# Altium PCB AYBR3000-V2.0.PcbDoc
Units mm, origin at the board's own origin, x right, y up, seen from the top; angles counter-clockwise.
Board outline 49 x 118.5 mm, 2 copper layers (TopLayer, BottomLayer); 74 components, 81 nets, 446 pads, 105 vias.
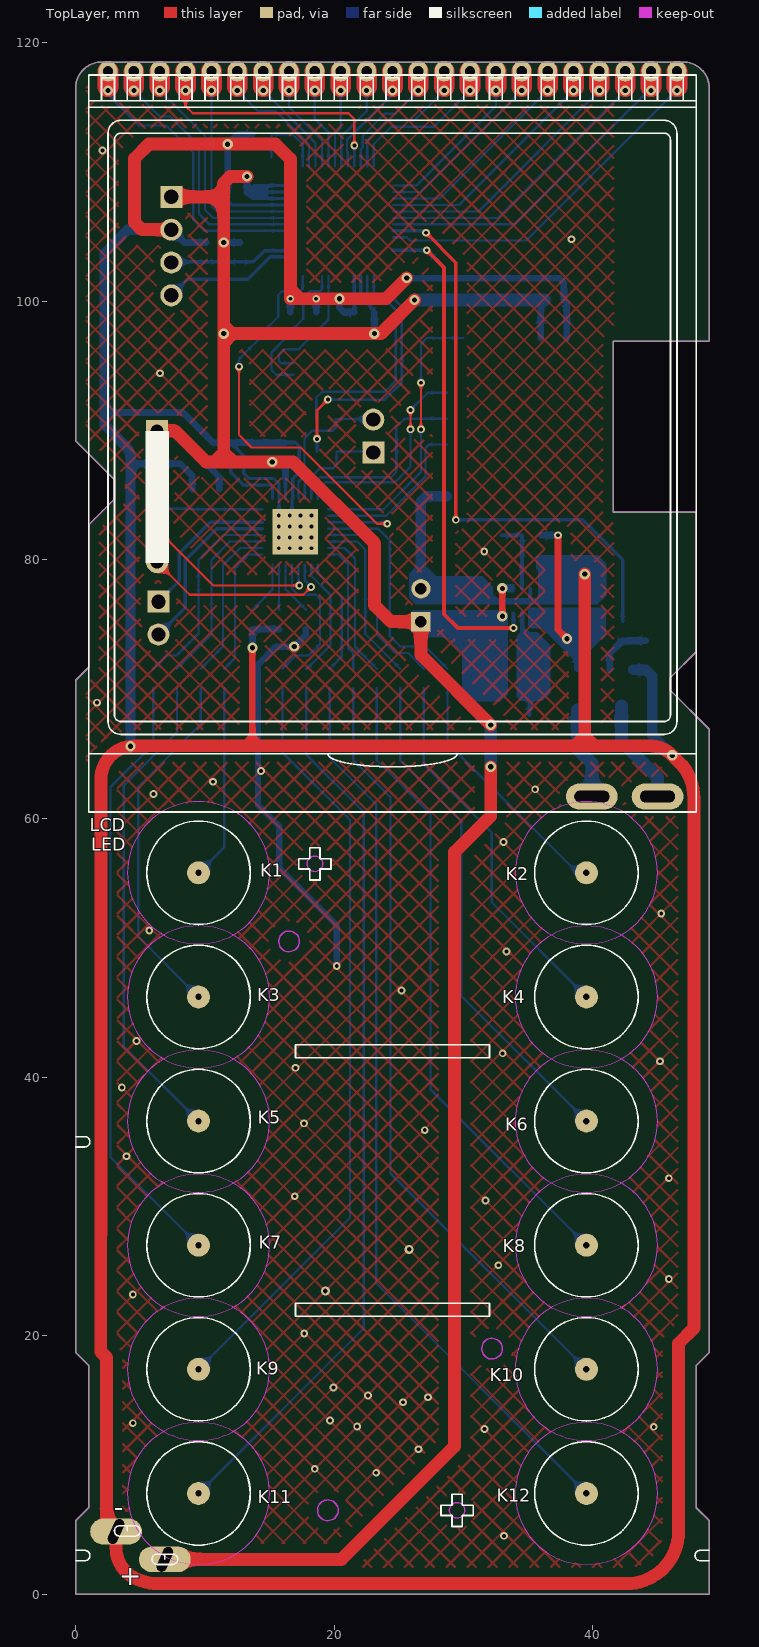
[diagram p0: TopLayer view]
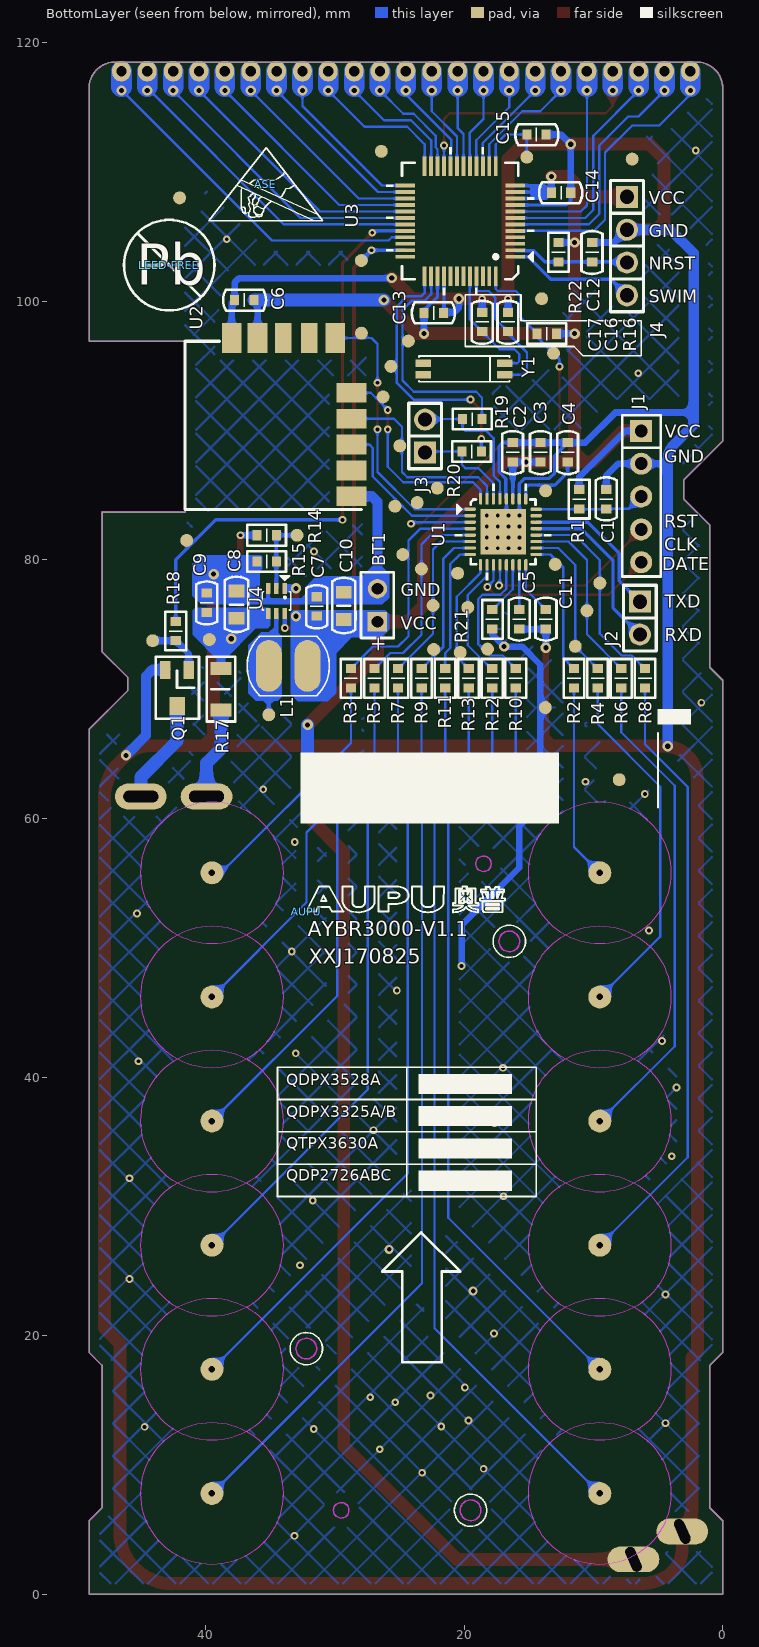
[diagram p1: BottomLayer view, seen from below]

## Layer stack, top to bottom
TopSolder: solder mask 0.0102, Solder Resist, Dk 3.5
TopLayer: signal copper 0.0356
Dielectric1: dielectric 0.32, FR-4, Dk 4.8
BottomLayer: signal copper 0.0356
BottomSolder: solder mask 0.0102, Solder Resist, Dk 3.5

## Board outline
0,0 0,5.7 1,6.7 1,17.7 0,18.7 0,70.7 1,71.7 1,82.7 3,84.7 3,86.2 0,89.2 0,116.5 cw(c2,116.5) 2,118.5 47,118.5 cw(c47,116.5) 49,116.5 48.997,116.497 48.997,96.901 41.58,96.901 41.58,83.7 48,83.7 48,72.9 46,70.9 46,69.9 49,66.9 49,18.7 48,17.7 48,6.7 49,5.7 49,0

## Design rules (kind name [scope] priority, off if disabled: settings)
Clearance Clearance_2 [All vs InPolygon] p1 off: gap=0.5 ignorepadtopadclearanceinfootprint=FALSE except(0.7: Arc-Fill Arc-Poly Arc-Region Track-Fill Track-Poly Track-Region)
Clearance Clearance_1 [All vs OnLayer('KeepOutLayer')] p2 off: gap=0.5 ignorepadtopadclearanceinfootprint=FALSE
Clearance [All] p3: gap=0.178 ignorepadtopadclearanceinfootprint=FALSE except(0.25: Arc-Fill Arc-Poly Arc-Region Track-Fill Track-Poly Track-Region SMDPad-Fill SMDPad-Poly SMDPad-Region THPad-Fill THPad-Poly THPad-Region Via-Fill Via-Poly Via-Region Fill-Fill Fill-Poly Fill-Region Poly-Poly Poly-Region Region-Region)
FabricationTestPointUsage TestPointUsage [All] p1: valid=0 allowmultiple=FALSE
FabricationTestpoint Testpoint [All] p1: side=3 testpointundercomponent=TRUE minsize=1.016 maxsize=2.54 preferedsize=1.524 minholesize=0.508 maxholesize=1.016 preferedholesize=0.813 testpointgrid=0.025 allowsidetop=TRUE allowsidebottom=TRUE usegrid=TRUE gridtolerance=0
HoleToHoleClearance [All] p1: gap=0 allowstackedmicrovias=TRUE
MinimumSolderMaskSliver [All] p1: minsoldermaskwidth=0
PolygonConnect PolygonConnect_1 [All] p1: thpad.connectstyle=Relief thpad.reliefconductorwidth=0.178 thpad.reliefentries=4 thpad.polygonreliefangle="90 Angle" thpad.airgapwidth=0.508 smdpad.connectstyle=Relief smdpad.reliefconductorwidth=0.178 smdpad.reliefentries=4 smdpad.polygonreliefangle="90 Angle" smdpad.airgapwidth=0.254 via.connectstyle=Direct via.reliefconductorwidth=0.254 via.reliefentries=4 via.polygonreliefangle="90 Angle" via.airgapwidth=0.254
PolygonConnect [All] p2: connectstyle=Direct reliefconductorwidth=0.254 reliefentries=4 polygonreliefangle="90 Angle" airgapwidth=0.254
RoutingPriority [All] p1: routingpriority=4
RoutingVias [All] p1: holewidth=0.508 width=1.27 viastyle="Through Hole" minholewidth=0.711 minwidth=1.27 maxholewidth=0.711 maxwidth=1.27
SilkToSilkClearance [All] p1: silktosilkclearance=0
SilkToSolderMaskClearance [IsPad] p1: minsilkscreentomaskgap=0 clearancetoexposedcopper=TRUE
SolderMaskExpansion [All] p1: expansion=0.102
Width [All] p1: maxlimit=3 minlimit=0.15 preferedwidth=0.178
23 further rules are at their usual default settings.

## Classes and differential pairs
component class AYBR3000-V2.0: ASE AUPU BT1 C1 C2 C3 C4 C5 C6 C7 C8 C9 C10 C11 C12 C13 C14 C15 C16 C17 J1 J2 J3 J4 K1 K2 K3 K4 K5 K6 K7 K8 K9 K10 K11 K12 L1 LCD LED LEED-FREE Q1 R1 R2 R3 R4 R5 R6 R7 R8 R9 R10 R11 R12 R13 R14 R15 R16 R17 R18 R19 R20 R21 R22 U1 U2 U3 U4 Y1

## Components (designator, comment, footprint, x,y, rotation, side; value= is the part's Value field where it differs from the comment)
ASE "ASE" _ASE 35.259,108.416 r180 bottom
AUPU "AUPU" aupu_logo 32.2,52.8 r180 bottom
BT1 "" BAT-2 26.7,76.5 r90 bottom
C1 "104P" C0603-T 9,84.7 r90 bottom
C2 "105P" C0603-T 16.247,88.321 r270 bottom
C3 "104P" C0603-T 14.088,88.321 r270 bottom
C4 "104P" C0603-T 11.992,88.321 r270 bottom
C5 "4.7nF" C0603-T 15.737,75.4 r90 bottom
C6 "100nF" C0603-T 37,100.1 r180 bottom
C7 "104P" C0603-T 31.4,76.4 r270 bottom
C8 "106P" C0805-T 37.6,76.54 r270 bottom
C9 "104P" C0603-T 39.9,76.7 r270 bottom
C10 "106P" C0805-T 29.3,76.45 r270 bottom
C11 "10nF" C0603-T 13.67,75.4 r90 bottom
C12 "104P" C0603-T 10.1,103.8 r270 bottom
C13 "104P" C0603-T 22.354,99.098 r0 bottom
C14 "104P" C0603-T 12.5,108.4 r0 bottom
C15 "105P" C0603-T 14.4,112.9 r180 bottom
C16 "15P" C0603-T 16.6,98.4 r270 bottom
C17 "15P" C0603-T 18.6,98.4 r270 bottom
J1 "CON5" PZ-1*5-M-DO 6.3,89.98 r270 bottom
J2 "" CZ-2.54-2P 6.4,75.5 r270 bottom
J3 "" CZ-2.54-2P 23.015,89.581 r90 bottom
J4 "nc 2.54mm/4针" CZ-2.54-4P 7.4,104.27 r270 bottom
K1 "" GYTH-YKLH-02A 9.5,55.8 r0 top
K2 "" GYTH-YKLH-02A 39.5,55.8 r0 top locked
K3 "" GYTH-YKLH-02A 9.5,46.2 r0 top
K4 "" GYTH-YKLH-02A 39.5,46.2 r0 top
K5 "" GYTH-YKLH-02A 9.5,36.6 r0 top
K6 "" GYTH-YKLH-02A 39.5,36.6 r0 top
K7 "" GYTH-YKLH-02A 9.5,27 r0 top
K8 "" GYTH-YKLH-02A 39.5,27 r0 top
K9 "" GYTH-YKLH-02A 9.5,17.4 r0 top
K10 "" GYTH-YKLH-02A 39.5,17.4 r0 top
K11 "" GYTH-YKLH-02A 9.5,7.8 r0 top
K12 "" GYTH-YKLH-02A 39.5,7.8 r0 top
L1 "10uH" CD32-T 33.6,71.8 r0 bottom
LCD "YKLH-02A液晶屏 A" LCD-YKLH-02A 2.5,117.8 r0 top locked
LED "背光" BLK-YKLH-02A-2 1,60.5 r0 top locked
LEED-FREE "LEED-FREE" _LEED-FREE 42.8,102.8 r180 bottom
Q1 "8050" SOT23-123-T 42.2,70.1 r0 bottom
R1 "47K,1%" R0603-T 11.1,84.7 r90 bottom
R2 "510R" R0603-T 11.5,70.837 r90 bottom
R3 "510R" R0603-T 28.751,70.837 r90 bottom
R4 "510R" R0603-T 9.67,70.837 r90 bottom
R5 "510R" R0603-T 26.929,70.837 r90 bottom
R6 "510R" R0603-T 7.84,70.837 r90 bottom
R7 "510R" R0603-T 25.108,70.837 r90 bottom
R8 "510R" R0603-T 6.011,70.837 r90 bottom
R9 "510R" R0603-T 23.286,70.837 r90 bottom
R10 "510R" R0603-T 16,70.837 r90 bottom
R11 "510R" R0603-T 21.465,70.837 r90 bottom
R12 "510R" R0603-T 17.822,70.837 r90 bottom
R13 "510R" R0603-T 19.643,70.837 r90 bottom
R14 "1M" R0603-T 35.274,81.906 r180 bottom
R15 "430K" R0603-T 35.274,79.874 r180 bottom
R16 "100K,5%" R0603-T 13.6,97.5 r0 bottom
R17 "10R" R1206-T 38.8,70 r90 bottom
R18 "20K" R0603-T 42.3,74.5 r90 bottom
R19 "0k" R0603-T 19.362,90.892 r180 bottom
R20 "0k" R0603-T 19.415,88.381 r180 bottom
R21 "1K,1%" R0603-T 17.808,75.4 r270 bottom
R22 "22K" R0603-T 12.7,103.8 r90 bottom
U1 "MCU_CY8C4024LQI-S412_QFN32" QFN32-5*5-T 16.977,82.17 r180 bottom
U2 "A7105" MD7105-A04 41.58,96.901 r180 bottom locked
U3 "MCU-STM8L052C6-48PIN" LQFP48-7*7-T 20.3,106.2 r0 bottom
U4 "SY7071" SOT363 34.512,76.826 r270 bottom locked
Y1 "32.768K" MC-146 19.99,94.767 r0 bottom
? "Comment" _MARK 14,100.2 r270 bottom
? "Comment" _MARK 26.4,111.6 r270 bottom
? "Comment" _MARK 42,108 r270 bottom
? "Comment" _MARK 7,111 r270 bottom
? "Comment" _MARK 8,63 r270 bottom
? "Comment" _ARROW 23.266,17.932 r90 bottom

## Footprints (in the part's own frame and the unit in brackets; to place one, negate y for a bottom-side part, rotate by r counter-clockwise, add the part's x,y. Pads: shape width x height; smd on the part's side, far side on the other; paste and mask are expansions set on the pad)
_ARROW [mm]
  silkscreen extent 0,-2.97 10.06,3.07
_ASE [mil]
  round 3.94 on Bottom Overlay: 157(-16.88,-72.78) 158(-13.58,-68.16) 159(-14.27,-62.82) 160(-13.58,-68.16) 161(-25.44,-73.84) 162(-21.39,-73.66) 163(-21.39,-73.66) 164(-16.88,-72.78) 165(-28.05,-72.49) 166(-25.57,-73.77) 167(-29.3,-68.34) 168(-28.05,-72.49) 169(-17.55,-68.35) 170(-9.75,-54.94) 171(81.45,21.12) 172(87.24,21.45) 173(70.33,12.35) 174(81.45,21.12) 175(57.45,11.18) 176(70.33,12.35) 177(55.11,3.58) 178(57.45,11.18) 179(49.85,-3.43) 180(55.11,3.58) 181(46.33,-11.62) 182(49.85,-3.43) 183(38.14,-14.55) 184(46.33,-11.62) 185(-79.37,38.24) 186(156.26,-67.83) 187(-91.88,22.29) 188(144.07,-85.89) 189(-11.6,-50.22) 190(-8.68,-50.22) 191(-17.46,-48.47) 192(-11.6,-50.22) 193(-27.41,-41.45) 194(-17.46,-48.47) 195(-30.33,-41.45) 196(-27.41,-41.45) 197(-38.53,-47.3) 198(-30.33,-41.45) 199(-64.87,-64.84) 200(-64.87,-58.99) 201(-65.45,-49.64) 202(-64.87,-58.99) 203(-68.38,-45.54) 204(-65.45,-49.64) 205(-73.64,-45.54) 206(-68.38,-45.54) 207(-77.74,-43.2) 208(-73.64,-45.54) 209(-25.07,-18.64) 210(-15.71,-12.63) 211(-25.07,-18.64) 212(-24.48,-24.49) 213(-26.82,-31.51) 214(-24.48,-24.49) 215(-30.92,-36.18) 216(-26.82,-31.51) 217(-38.53,-39.11) 218(-30.92,-36.18) 219(4.2,-34.43) 220(13.33,-25.95) 221(0.69,-38.52) 222(4.2,-34.43) 223(-8.68,-49.05) 224(0.69,-38.52) 225(-9.85,-54.9) 226(-8.68,-49.05) 227(-29.16,-68.35) 228(-17.46,-68.35) 229(-35.02,-63.09) 230(-29.16,-68.35) 231(-34.43,-13.38) 232(-34.43,-4.05) 233(-37.94,-18.06) 234(-34.43,-13.38) 235(-42.04,-21.57) 236(-37.94,-18.06) 237(-43.21,-26.24) 238(-42.04,-21.57) 239(-43.8,-35.01) 240(-43.21,-26.24) 241(-43.8,-35.01) 242(-39.11,-39.11) 243(-39.11,-47.3) 244(-39.11,-39.11) 245(-40.28,-58.99) 246(-39.11,-47.3) 247(-40.28,-58.99) 248(-36.77,-61.92) 249(-36.77,-61.92) 250(-33.26,-64.84) 251(-33.26,-64.84) 252(-31.51,-74.2) 253(-36.77,-75.95) 254(-31.51,-74.2) 255(-48.48,-75.95) 256(-36.77,-75.95) 257(-54.33,-70.69) 258(-48.48,-75.95) 259(-54.33,-70.69) 260(-54.33,-59.58) 261(-47.89,-6.36) 262(-39.04,-1.94) 263(-50.82,-11.04) 264(-47.89,-6.36) 265(-56.08,-13.96) 266(-50.82,-11.04) 267(-56.08,-13.96) 268(-55.5,-21.57) 269(-55.5,-21.57) 270(-53.74,-23.32) 271(-53.74,-23.32) 272(-52.57,-30.92) 273(-54.92,-34.43) 274(-52.57,-30.92) 275(-55.5,-37.94) 276(-54.92,-34.43) 277(-55.5,-37.94) 278(-53.74,-42.03) 279(-53.74,-42.03) 280(-50.82,-47.88) 281(-52.57,-58.41) 282(-50.82,-47.88) 283(-66.03,-65.43) 284(-52.57,-58.41) 285(-73.06,-59.58) 286(-66.03,-65.43) 287(-75.4,-52.56) 288(-73.06,-59.58) 289(-78.33,-47.88) 290(-75.4,-52.56) 291(-78.33,-47.88) 292(-78.33,8.26) 293(-78.33,8.26) 294(-73.96,14.07) 295(-53.78,26.72) 296(-39.11,36.91) 297(-39.11,36.91) 298(-27.41,40.42) 299(-27.41,40.42) 300(26.44,39.25) 301(26.44,39.25) 302(34.63,43.93) 303(34.63,43.93) 304(51.02,55.05) 305(51.02,55.05) 306(53.53,65.07) 307(-2,136.9) 308(170.69,-86.5) 309(-177.19,-86.5) 310(170.69,-86.5) 311(-177.19,-86.5) 312(-2,136.9)
  silkscreen extent -177,-86 171,137
_LEED-FREE [mm]
  silkscreen extent -3.5,-3.5 3.5,3.5
_MARK [mm]
  round 1 smd: 1(0,0)
aupu_logo [mm]
  silkscreen extent 0,-0.06 15.38,1.94
BAT-2 [mm] "Battery; 2 Leads"
  rect 1.5x1.5 hole 0.9: 1(-1.27,0)
  round 1.5 hole 0.9: 2(1.27,0)
  silkscreen extent -2.54,-1.27 2.54,1.27
BLK-YKLH-02A-2 [mm]
  oval 4x2 hole 0.9 slot 2.7 at 0 deg: 1(38.92,1.2) 2(44,1.2)
  silkscreen extent 0,0 47,54.5
C0603-T [mm]
  rect 0.7x0.8 smd: 1(-0.75,0) 2(0.75,0)
  silkscreen extent -1.64,-0.82 1.69,0.81
C0805-T [mm]
  rect 1x1.2 smd: 1(-1.05,0) 2(1.05,0)
  silkscreen extent -2.16,-0.9 2.11,0.9
CD32-T [mm]
  oval 2x4 smd: 1(-1.5,0) 2(1.5,0)
  silkscreen extent -3.18,-2.3 3.18,2.3
CZ-2.54-2P [mm] "插针"
  rect 1.7x1.7 hole 1.1: 1(-1.27,0)
  round 1.7 hole 1.1: 2(1.27,0)
  silkscreen extent -2.54,-1.27 2.54,1.27
CZ-2.54-4P [mm] "插针"
  rect 1.7x1.7 hole 1.1: 1(-3.81,0)
  round 1.7 hole 1.1: 2(-1.27,0) 3(1.27,0) 4(3.81,0)
  silkscreen extent -5.08,-1.27 5.08,1.27
GYTH-YKLH-02A [mil]
  round 70 hole 19.68: 1(0,0)
  silkscreen extent -157,-157 157,157
LCD-YKLH-02A [mm]
  oval 1.45x1.6 hole 0.8: 1(0,0) 2(2,0) 3(4,0) 4(6,0) 5(8,0) 6(10,0) 7(12,0) 8(14,0) 9(16,0) 10(18,0) 11(20,0) 12(22,0) 13(24,0) 14(26,0) 15(28,0) 16(30,0) 17(32,0) 18(34,0) 19(36,0) 20(38,0) 21(40,0) 22(42,0) 23(44,0)
  silkscreen extent -1.5,-53.8 45.5,-0.3
LQFP48-7*7-T [mm]
  rect 1.5x0.3 smd: 1(-4.25,2.75) 2(-4.25,2.25) 3(-4.25,1.75) 4(-4.25,1.25) 5(-4.25,0.75) 6(-4.25,0.25) 7(-4.25,-0.25) 8(-4.25,-0.75) 9(-4.25,-1.25) 10(-4.25,-1.75) 11(-4.25,-2.25) 12(-4.25,-2.75) 25(4.25,-2.75) 26(4.25,-2.25) 27(4.25,-1.75) 28(4.25,-1.25) 29(4.25,-0.75) 30(4.25,-0.25) 31(4.25,0.25) 32(4.25,0.75) 33(4.25,1.25) 34(4.25,1.75) 35(4.25,2.25) 36(4.25,2.75)
  rect 0.3x1.5 smd: 13(-2.75,-4.25) 14(-2.25,-4.25) 15(-1.75,-4.25) 16(-1.25,-4.25) 17(-0.75,-4.25) 18(-0.25,-4.25) 19(0.25,-4.25) 20(0.75,-4.25) 21(1.25,-4.25) 22(1.75,-4.25) 23(2.25,-4.25) 24(2.75,-4.25) 37(2.75,4.25) 38(2.25,4.25) 39(1.75,4.25) 40(1.25,4.25) 41(0.75,4.25) 42(0.25,4.25) 43(-0.25,4.25) 44(-0.75,4.25) 45(-1.25,4.25) 46(-1.75,4.25) 47(-2.25,4.25) 48(-2.75,4.25)
  silkscreen extent -5.75,-5.75 5.75,5.75
MC-146 [mm]
  rect 1.2x0.6 smd: 1(-3.15,-0.45) 2(3.15,-0.45) 3(3.15,0.45) 4(-3.15,0.45)
  silkscreen extent -3.5,-1 3.5,1
MD7105-A04 [mil]
  rect 60x90.55 smd: 1(142.04,10.19) 2(220.78,10.19) 5(457,10.19)
  rect 50x90.55 smd: 3(299.52,10.19) 4(378.26,10.19)
  rect 90.55x60 smd: 7(507,-156.66) 8(507,-235.4) 9(507,-314.14) 10(507,-392.88) 11(507,-471.62)
  silkscreen extent 0,-512 537,0
PZ-1*5-M-DO [mm]
  rect 1.7x1.7 hole 1: 1(0,0)
  round 1.7 hole 1: 2(2.54,0) 3(5.08,0) 4(7.62,0) 5(10.16,0)
  silkscreen extent -1.2,-1.47 11.26,1.5
QFN32-5*5-T [mm]
  round 0.6 hole 0.3: 0(-1.27,-1.27) 0(-1.27,-0.423) 0(-1.27,0.423) 0(-1.27,1.27) 0(-0.423,-1.27) 0(-0.423,-0.423) 0(-0.423,0.423) 0(-0.423,1.27) 0(0.423,1.27) 0(0.423,-1.27) 0(0.423,-0.423) 0(0.423,0.423) 0(1.27,1.27) 0(1.27,-1.27) 0(1.27,-0.423) 0(1.27,0.423)
  rect 3.5x3.5 smd far side: 0(0,0)
  rect 3.5x3.5 smd paste-1.75 mask+0.051: 0(0,0)
  oval 0.9x0.26 smd mask+0.051: 1(-2.55,1.75) 2(-2.55,1.25) 3(-2.55,0.75) 4(-2.55,0.25) 5(-2.55,-0.25) 6(-2.55,-0.75) 7(-2.55,-1.25) 8(-2.55,-1.75) 17(2.55,-1.75) 18(2.55,-1.25) 19(2.55,-0.75) 20(2.55,-0.25) 21(2.55,0.25) 22(2.55,0.75) 23(2.55,1.25) 24(2.55,1.75)
  oval 0.26x0.9 smd mask+0.051: 9(-1.75,-2.55) 10(-1.25,-2.55) 11(-0.75,-2.55) 12(-0.25,-2.55) 13(0.25,-2.55) 14(0.75,-2.55) 15(1.25,-2.55) 16(1.75,-2.55) 25(1.75,2.55) 26(1.25,2.55) 27(0.75,2.55) 28(0.25,2.55) 29(-0.25,2.55) 30(-0.75,2.55) 31(-1.25,2.55) 32(-1.75,2.55)
  silkscreen extent -3.75,-3.75 3.75,3.75
R0603-T [mm]
  rect 0.7x0.8 smd: 1(-0.75,0) 2(0.75,0)
  silkscreen extent -1.5,-0.8 1.5,0.8
R1206-T [mm]
  rect 1x1.6 smd: 1(-1.6,0) 2(1.6,0)
  silkscreen extent -2.5,-1.1 2.5,1.1
SOT23-123-T [mm]
  rect 0.8x1.4 smd: 1(-0.9,-1.4) 2(0.9,-1.4)
  rect 1.2x1.4 smd: 3(0,1.4)
  silkscreen extent -1.7,-2.4 1.65,2.4
SOT363 [mm]
  rect 0.85x0.35 smd: 1(-0.975,0.65) 2(-0.975,0) 3(-0.975,-0.65) 4(0.975,-0.65) 5(0.975,0) 6(0.975,0.65)
  silkscreen extent -1.96,-1.1 0.7,1.1

## Part data
BT1: library part Battery, "Multicell Battery", LatestRevisionDate=17-Jul-2002, LatestRevisionNote="Re-released for DXP Platform.", PackageDescription="Battery; 2 Leads", PackageReference=BAT-2, Published=24-Mar-1999, Publisher="Altium Limited"
C1 C2 C3 C4 C5 C7 C8 C9 C10 C11 C12 C13 C14 C15 C16 C17: library part CAP, "Capacitor"
C6: library part CAP
J1: "Connector"
J2 J3: library part CMA-6542PF, "Header, 2-Pin"
J4: library part CON4, "Connector"
K1 K2 K3 K4 K5 K6 K7 K8 K9 K10 K11 K12: library part KEY_TCH
L1: library part L
LCD: library part YKLH-02A液晶屏
LED: library part LED
Q1: library part NPN, "NPN Transistor"
R1 R2 R3 R4 R5 R6 R7 R8 R9 R10 R11 R12 R13 R14 R15 R16 R17 R18 R19 R20 R21 R22: library part RES2
U2: library part CON11, "Connector"
U3: library part MCU-STM8L052C6
Y1: library part CRYSTAL, "Crystal"

## Free pads (board coordinates)
  round 1 smd far side: 1(15.15,111.15) 6(13.081,95.981) 7(24.308,96.926) 8(25.654,94.971) 9(27.94,97.536) 10(26.264,92.608) 11(24.968,88.824) 12(22.073,85.547) 13(23.622,84.43) 14(25.349,84.15) 15(24.74,80.416) 16(23.3,79.299) 17(22.4,76.479) 18(22.352,73.076) 19(20.498,78.969) 20(20.3,72.847) 21(19.71,76.327) 22(18.186,73.101) 23(13.716,68.58) 24(44.083,73.75) 25(41.453,81.509) 26(39.7,73.838) 27(35.1,68.021) 28(32.918,81.906) 29(12.954,79.654) 30(11.4,73.316) 31(10.5,76.073) 32(9.5,78.207) 33(13.691,85.344) 34(27.945,103.155)
  oval 4x2 hole 0.762 slot 2 at 66.24 deg: 5(3.124,4.856) 5(6.897,2.708)

## Via types
v1: diameter 0.6, hole 0.3, TopLayer to BottomLayer, tented both sides, 61 vias
v2: diameter 0.8, hole 0.4, TopLayer to BottomLayer, tented both sides, 42 vias
v3: diameter 0.7, hole 0.35, TopLayer to BottomLayer, tented both sides, 2 vias

## Nets (pads, with @x,y where several pads share a name; then routed paths per layer and width w, separated by ;. In a path a pad name is that pad's centre, name@x,y a point inside that pad or via, vN(x,y) a via of type N, cw(c..) or ccw(c..) an arc to the next point about the centre after c; other vN are vias at no path point)
COM0: LCD.1 U3.5 | length 23.7
  TopLayer w1.6: v2@2.5,116.6 LCD.1
  BottomLayer w0.178: v2(2.5,116.3) 2.5,116 4.9,113.6 7,113.6 9.1,111.5 9.1,106.3 9.95,105.45 U3.5
  BottomLayer w1.6: v2@2.5,116.6 LCD.1
COM1: LCD.2 U3.6 | length 21.3
  TopLayer w1.6: v2@4.5,116.6 LCD.2
  BottomLayer w0.178: v2(4.5,116.3) 6.5,114.3 7.3,114.3 9.544,112.056 9.544,106.759 10.353,105.95 U3.6
  BottomLayer w1.6: v2@4.5,116.6 LCD.2
COM2: LCD.3 U3.7 | length 19.4
  TopLayer w1.6: v2@6.5,116.6 LCD.3
  BottomLayer w0.178: v2(6.5,116.3) 10,112.8 10,107.085 10.635,106.45 U3.7
  BottomLayer w1.6: v2@6.5,116.6 LCD.3
COM3: LCD.4 U3.21 | length 21
  TopLayer w0.178: v2@8.5,116.6 8.5,115.1 9.05,114.55 21.1,114.55 21.55,114.1 v1(21.55,112.05)
  TopLayer w1.6: v2@8.5,116.6 LCD.4
  BottomLayer w0.178: U3.21 v1(21.55,112.05)
  BottomLayer w1.6: v2@8.5,116.6 LCD.4
  other v2: 8.5,116.3
EN: pad.34 U3.35 U4.6 | length 39.4
  TopLayer w0.3: v1(27.15,103.95) 28.5,102.6 28.5,75.8 29.574,74.726 v1(33.862,74.726)
  BottomLayer w0.3: U3.35 v1(27.15,103.95) pad.34 ; v1(33.862,74.726) U4.6
GIO1: pad.9 pad.13 U1.1 U2.5 | length 21.7
  TopLayer w0.178: v1(26.7,90.1) v1(26.7,93.7)
  BottomLayer w0.178: U1.1 23.82,83.92 26.7,86.8 v1(26.7,90.1) ; v1(26.7,93.7) 26.7,96.7 27.16,97.16 U2.5
GND: BT1.2 C1.2 C2.1 C3.1 C4.1 C5.1 C6.1 C7.1 C8.1 C9.1 C10.1 C11.1 C12.1 C13.1 C14.1 C15.2 C16.1 C17.1 J1.2 J4.2 pad.5@3.124,4.856 Q1.2 R15.1 U1.0 U1.26 U1.28 U2.1 U2.11 U3.9 U3.40 U4.3 | length 436.1
  TopLayer w0.508: 13.67,65.625 v2(13.67,73.2)
  TopLayer w1: J4.2 5.113,105.54 4.549,106.104 4.549,111.046 5.653,112.15 v2(11.75,112.15) 15.45,112.15 16.6,111 v1(16.6,100.2) v1(18.6,100.2) v2(20.4,100.2) 24,100.2 v2(25.6,101.8) ; v2(39.37,78.9) 39.37,65.701 39.446,65.625 ; 39.446,65.625 44.347,65.625 cw(c44.347,63.085) v2(46.143,64.881) 46.954,64.069 cw(c43.812,61.595) 47.812,61.595 47.812,20.583 46.621,19.392 46.621,4.831 cw(c42.621,4.831) 42.621,0.831 6.375,0.831 cw(c6.375,4.831) 4.12,1.528 3.868,1.78 cw(c5.664,3.576) 3.124,3.576 3.124,4.856 3.119,4.861 cw(c4.915,6.657) 2.375,6.657 2.375,18.326 1.938,18.763 1.939,20.407 1.94,23.328 1.941,26.249 1.943,29.17 1.944,32.091 1.945,35.012 1.947,37.933 1.948,40.854 1.95,43.775 1.951,46.696 1.952,49.617 1.954,52.538 1.955,55.459 1.958,61.628 1.958,63.055 cw(c4.498,63.055) 4.498,65.595 5.461,65.595 5.491,65.625 13.67,65.625 39.446,65.625
  BottomLayer w0.254: C14.1 11.75,107.786 12.086,107.45 U3.9 ; C4.1 13,88.063 13,86.7 13.4,86.3 15.3,86.3 15.727,85.873 U1.26 15.727,83.42 U1.0@16.553,82.593 ; C2.1 17.036,89.071 17.3,88.807 17.3,86.8 16.786,86.286 16.786,84.779 U1.28 16.727,82.42 U1.0@16.977,82.17 ; U3.40 21.55,99.152 C13.1 ; 35.154,76.8 35.162,76.808 ; 35.162,76.8 35.162,76.808 ; U4.3 35.162,76.808
  BottomLayer w0.5: 4.242,87.44 J1.2 8.089,87.44 9,86.529 C1.2 ; C14.1 v2(11.75,112.15) 12.5,112.9 C15.2 ; v2(25.6,101.8) 37.4,101.8 37.75,101.45 C6.1 37.972,99.878 U2.1
  BottomLayer w0.508: 2.235,91.4 8.3,91.4 10.629,89.071 C4.1 C3.1 C2.1 ; J4.2 8.39,104.55 C12.1 ; v2(13.67,73.2) C11.1 C5.1 ; C16.1 v1(16.6,100.2) ; C17.1 v1(18.6,100.2) ; v2(20.4,100.2) 20.4,99.5 20.748,99.152 C13.1@21.55,99.152 ; BT1.2@27.2,77.77 29.53,77.77 30.141,77.159 32.1,77.159 32.459,76.8 35.154,76.8 35.162,76.8 35.8,76.8 36.024,77.024 ; R15.1 36.024,77.024 ; C9.1 37.74,77.45 C8.1 36.59,77.59 36.024,77.024
  BottomLayer w0.8: v2(4.242,65.583) 4.242,87.44 4.242,87.832 ccw(c2.768,87.832) 4.2,88.181 ccw(c2.768,87.832) 3.811,88.874 2.235,90.449 2.235,91.4 2.235,103.735 4.04,105.54 J4.2 ; BT1.2 26.7,84.5 27.122,84.922 U2.11 ; Q1.2 44.1,71.5 44.6,71 44.6,66.424 v2(46.143,64.881)
KEY1: pad.29 R2.2 U1.17 | length 10.7
  BottomLayer w0.178: R2.2 12.319,72.406 12.319,79.419 13.32,80.42 U1.17
KEY2: pad.30 R4.2 U1.18 | length 12.3
  BottomLayer w0.178: R4.2 pad.30 11.4,79.6 12.72,80.92 U1.18
KEY3: pad.31 R6.2 U1.19 | length 14
  BottomLayer w0.178: R6.2 10.5,74.246 pad.31 10.5,80 11.92,81.42 U1.19
KEY4: pad.32 R8.2 U1.20 | length 16
  BottomLayer w0.178: R8.2 7.024,72.6 7.8,72.6 9.5,74.3 pad.32 9.5,80 11.42,81.92 U1.20
KEY5: pad.22 R10.2 U1.13 | length 11.5
  BottomLayer w0.178: R10.2 17.013,72.6 18.013,72.6 18.898,73.484 18.898,76.97 18.567,77.3 17.2,77.3 16.727,77.773 U1.13
KEY6: pad.21 R12.2 U1.10 | length 9.5
  BottomLayer w0.178: R12.2 17.891,71.587 19.71,73.406 pad.21 19.71,77.29 18.227,78.773 U1.10
KEY7: pad.15 R3.2 U1.4 | length 18
  BottomLayer w0.178: U1.4 23.38,82.42 24.3,81.5 24.3,74.1 25.1,73.3 27.037,73.3 R3.2
KEY8: pad.16 R5.2 U1.5 | length 15.8
  BottomLayer w0.178: U1.5 22.58,81.92 23.3,81.2 pad.16 23.3,74.216 24.716,72.8 25.716,72.8 R5.2
KEY9: pad.17 R7.2 U1.6 | length 13.5
  BottomLayer w0.178: U1.6 21.78,81.42 22.4,80.8 pad.17 22.4,74.294 R7.2
KEY10: pad.18 R9.2 U1.7 | length 11.6
  BottomLayer w0.178: U1.7 20.78,80.92 21.6,80.1 21.6,73.273 R9.2
KEY11: pad.19 R11.2 U1.8 | length 10.1
  BottomLayer w0.178: U1.8 20.324,80.42 21.067,79.677 21.067,73.192 21.465,72.795 R11.2
KEY12: pad.20 R13.2 U1.9 | length 9.2
  BottomLayer w0.178: U1.9 18.727,78.995 20.574,77.148 20.574,72.517 R13.2
LED: pad.25 R18.2 U3.32 | length 44.7
  TopLayer w0.254: v1(27.1,105.3) 29.4,103 v1(29.4,83.1)
  BottomLayer w0.254: U3.32 26.95,105.45 v1(27.1,105.3) ; v1(29.4,83.1) 39.2,83.1 42.3,80 R18.2
NetC4_2: C4.2 pad.33 U1.25 | length 5.4
  BottomLayer w0.254: C4.2 11.992,86.763 12.955,85.8 15,85.8 15.227,85.573 U1.25
NetC5_2: C5.2 U1.15 | length 3.5
  BottomLayer w0.178: U1.15 15.727,76.161 C5.2
NetC11_2: C11.2 U1.16 | length 4.1
  BottomLayer w0.178: C11.2 15.227,77.707 U1.16
NetC15_1: C15.1 pad.1 U3.13 | length 6.2
  BottomLayer w0.178: pad.1 C15.1 16.797,112.9 17.55,112.147 U3.13
NetK1_1: K1.1 R2.1 | length 15.1
  BottomLayer w0.178: K1.1 11.5,57.8 R2.1
NetK2_1: K2.1 R3.1 | length 19.1
  BottomLayer w0.178: R3.1 28.751,65.849 38.8,55.8 K2.1
NetK3_1: K3.1 R4.1 | length 27.8
  BottomLayer w0.178: K3.1 4.833,50.867 4.833,62.465 9.67,67.303 R4.1
NetK4_1: K4.1 R5.1 | length 29.1
  BottomLayer w0.178: R5.1 26.929,64.171 32.183,58.917 32.183,53.517 K4.1
NetK5_1: K5.1 R6.1 | length 37.6
  BottomLayer w0.178: R6.1 7.84,66.667 3.708,62.535 3.708,42.392 K5.1
NetK6_1: K6.1 R7.1 | length 39.4
  BottomLayer w0.178: R7.1 25.108,64.492 29.816,59.784 29.816,46.284 K6.1
NetK7_1: K7.1 R8.1 | length 47.3
  BottomLayer w0.178: R8.1 6.011,65.751 2.692,62.433 2.692,33.808 K7.1
NetK8_1: K8.1 R9.1 | length 49.8
  BottomLayer w0.178: R9.1 23.286,64.514 27.449,60.351 27.449,39.051 K8.1
NetK9_1: K9.1 R10.1 | length 59.7
  BottomLayer w0.178: K9.1 21.216,29.116 21.216,59.9 16,65.116 R10.1
NetK10_1: K10.1 R11.1 | length 60.2
  BottomLayer w0.178: R11.1 21.465,64.535 24.354,61.646 24.354,32.546 K10.1
NetK11_1: K11.1 R12.1 | length 69.4
  BottomLayer w0.178: K11.1 22.283,20.583 22.283,60.5 17.822,64.961 R12.1
NetK12_1: K12.1 R13.1 | length 70.5
  BottomLayer w0.178: R13.1 19.643,64.705 23.248,61.1 23.248,24.052 K12.1
NetL1_2: L1.2 pad.27 U4.5 | length 7.2
  BottomLayer w0.305: L1.2@34.512,72.388 U4.5 ; pad.27 L1.2
NetLED_1: LED.1 R17.1 | length 7.2
  BottomLayer w1: R17.1 38.8,65.4 39.92,64.28 LED.1
NetLED_2: LED.2 Q1.3 | length 8.2
  BottomLayer w1: Q1.3 42.2,66 45,63.2 LED.2
NetQ1_1: pad.24 Q1.1 R18.1 | length 4.4
  BottomLayer w0.508: Q1.1 41.3,72.75 R18.1 pad.24
NetR14_2: pad.28 R14.2 R15.2 U4.2 | length 5.7
  BottomLayer w0.305: pad.28 R14.2 R15.2 ; U4.2 R15.2@34.512,79.874
NetR21_1: R21.1 U1.14 | length 4.1
  BottomLayer w0.178: U1.14 16.227,77.731 R21.1
NRST: C12.2 J4.3 R22.1 U3.2 | length 9
  BottomLayer w0.254: J4.3 7.45,103.05 C12.2 R22.1 13.75,103.05 14.605,103.905 16.005,103.905 U3.2
OSC32_IN: C17.2 U3.44 Y1.1 | length 10
  BottomLayer w0.178: Y1.1 15.882,95.217 15.723,95.377 15.723,95.91 16.104,96.291 17.241,96.291 C17.2 19.55,98.6 U3.44
OSC32_OUT: C16.2 U3.45 Y1.4 | length 11.2
  BottomLayer w0.178: Y1.4 15.512,94.317 15.138,94.692 15.138,96.038 16.6,97.5 C16.2 17.6,98.65 17.6,100.3 18.1,100.8 18.9,100.8 19.05,100.95 U3.45
P1.0: J3.2 R19.1 U1.29 | length 11.2
  BottomLayer w0.178: U1.29 17.227,86.027 17.7,86.5 17.7,89.4 18.3,90 19.9,90 20.112,90.212 R19.1 22.975,90.892 J3.2
P1.1: J3.1 R20.1 U1.30 | length 8.1
  BottomLayer w0.178: U1.30 17.727,85.927 18.889,87.089 19.9,87.089 20.165,87.354 R20.1 22.945,88.381 J3.1
RST: C1.1 J1.3 R1.1 U1.24 | length 8.5
  BottomLayer w0.178: J1.3 7.25,83.95 C1.1 ; C1.1@9,83.92 U1.24
RXD: J2.2 U1.21 | length 13.6
  BottomLayer w0.254: J2.2 8.484,76.314 8.484,79.984 10.92,82.42 U1.21
SCK: pad.11 U1.31 U2.8 | length 15.7
  BottomLayer w0.178: U1.31 18.227,85.727 18.9,86.4 24.4,86.4 24.8,86.8 24.8,90.3 25.422,90.922 U2.8
SCL: pad.7 R19.2 U3.38 | length 17.9
  BottomLayer w0.178: R19.2 18.612,92.545 19.066,93 23.9,93 24.765,93.865 24.765,99.335 24.067,100.033 23.067,100.033 22.55,100.55 U3.38
SCS: pad.14 U1.2 U2.9 | length 13.1
  BottomLayer w0.178: U1.2 24.02,83.42 27.056,86.456 27.056,88.656 27.322,88.922 U2.9 ; U2.9@28.48,88.697 U2.9@28.702,88.919
SDA: pad.8 R20.2 U3.37 | length 20.4
  TopLayer w0.2: v1(18.665,89.365) 18.665,91.565 v1(19.5,92.4)
  BottomLayer w0.2: R20.2 v1(18.665,89.365) ; v1(19.5,92.4) 23.9,92.4 25.222,93.722 25.222,99.578 24.4,100.4 23.3,100.4 23.05,100.65 U3.37
SDIO: pad.10 pad.12 U1.32 U2.7 | length 16.4
  TopLayer w0.178: v1(25.9,90.1) v1(25.9,91.6)
  BottomLayer w0.178: U1.32 18.727,85.427 19.3,86 24.7,86 25.9,87.2 v1(25.9,90.1) ; v1(25.9,91.6) 27.222,92.922 U2.7
SEG0: LCD.5 U3.8 | length 17.3
  TopLayer w1.6: v2@10.5,116.6 LCD.5
  BottomLayer w0.178: v2@10.5,116.6 v2(10.5,116.3) 10.5,110 10.5,107.419 10.969,106.95 U3.8
  BottomLayer w1.6: v2@10.5,116.6 LCD.5
SEG1: LCD.6 U3.14 | length 11.8
  TopLayer w1.6: v2@12.5,116.6 LCD.6
  BottomLayer w0.178: 12.033,116.3 v2(12.5,116.3) 14.1,114.7 15.5,114.7 18.05,112.15 U3.14
  BottomLayer w1.6: v2@12.5,116.6 LCD.6
SEG2: LCD.7 U3.15 | length 9.9
  TopLayer w1.6: v2@14.5,116.6 LCD.7
  BottomLayer w0.178: v2(14.5,116.3) 18.55,112.25 U3.15
  BottomLayer w1.6: v2@14.5,116.6 LCD.7
SEG3: LCD.8 U3.16 | length 9.6
  TopLayer w1.6: v2@16.5,116.6 LCD.8
  BottomLayer w0.178: v2@16.5,116.6 v2(16.5,116.3) 16.5,115 19.05,112.45 U3.16
  BottomLayer w1.6: v2@16.5,116.6 LCD.8
SEG4: LCD.9 U3.17 | length 9
  TopLayer w1.6: v2@18.5,116.6 LCD.9
  BottomLayer w0.178: v2@18.5,116.6 v2(18.5,116.3) 18.5,114.1 19.55,113.05 U3.17
  BottomLayer w1.6: v2@18.5,116.6 LCD.9
SEG5: LCD.10 U3.18 | length 8.7
  TopLayer w1.6: v2@20.5,116.6 LCD.10
  BottomLayer w0.178: U3.18 20.05,112.95 20.5,113.4 v2(20.5,116.3) v2@20.5,116.6
  BottomLayer w1.6: v2@20.5,116.6 LCD.10
SEG6: LCD.11 U3.19 | length 9.1
  TopLayer w1.6: v2@22.5,116.6 LCD.11
  BottomLayer w0.178: U3.19 20.55,112.75 22.5,114.7 v2(22.5,116.3)
  BottomLayer w1.6: v2@22.5,116.6 LCD.11
SEG7: LCD.12 U3.20 | length 9.8
  TopLayer w1.6: v2@24.5,116.6 LCD.12
  BottomLayer w0.178: U3.20@20.983,111.015 U3.20@21.05,110.948 ; U3.20 U3.20@21.05,110.948 ; v2(24.5,116.3) 24.5,116 20.983,112.483 20.983,111.619 21.05,111.552 U3.20@21.05,110.948
  BottomLayer w1.6: v2@24.5,116.6 LCD.12
SEG8: LCD.13 U3.22 | length 11
  TopLayer w1.6: v2@26.5,116.6 LCD.13
  BottomLayer w0.178: U3.22 U3.22@22.05,110.948 ; U3.22@22.117,111.015 U3.22@22.05,110.948 ; v2@26.772,116.028 v2(26.5,116.3) 24.7,114.5 23.9,114.5 22.194,112.794 22.194,111.892 22.05,111.748 U3.22@22.05,110.948
  BottomLayer w1.6: v2@26.5,116.6 LCD.13
SEG9: LCD.14 U3.23 | length 11.9
  TopLayer w1.6: v2@28.5,116.6 LCD.14
  BottomLayer w0.178: U3.23 22.55,112.45 24.1,114 26.2,114 v2(28.5,116.3)
  BottomLayer w1.6: v2@28.5,116.6 LCD.14
SEG10: LCD.15 U3.24 | length 13.3
  TopLayer w1.6: v2@30.5,116.6 LCD.15
  BottomLayer w0.178: U3.24 23.05,112.15 24.4,113.5 27.7,113.5 v2(30.5,116.3)
  BottomLayer w1.6: v2@30.5,116.6 LCD.15
SEG11: LCD.16 U3.25 | length 14.1
  TopLayer w1.6: v2@32.5,116.6 LCD.16
  BottomLayer w0.178: U3.25 26.35,108.95 32.5,115.1 v2(32.5,116.3)
  BottomLayer w1.6: v2@32.5,116.6 LCD.16
SEG12: LCD.17 U3.26 | length 15.6
  TopLayer w1.6: v2@34.5,116.6 LCD.17
  BottomLayer w0.178: U3.26 26.65,108.45 v2(34.5,116.3)
  BottomLayer w1.6: v2@34.5,116.6 LCD.17
SEG13: LCD.18 U3.27 | length 17.8
  TopLayer w1.6: v2@36.5,116.6 LCD.18
  BottomLayer w0.178: U3.27 28.15,107.95 v2(36.5,116.3)
  BottomLayer w1.6: v2@36.5,116.6 LCD.18
SEG14: LCD.19 U3.28 | length 20.4
  TopLayer w1.6: v2@38.5,116.6 LCD.19
  BottomLayer w0.178: U3.28 29.65,107.45 v2(38.5,116.3) v2@38.119,116.3
  BottomLayer w1.6: v2@38.5,116.6 LCD.19
SEG15: LCD.20 U3.29 | length 22.7
  TopLayer w1.6: v2@40.5,116.6 LCD.20
  BottomLayer w0.178: U3.29 31.15,106.95 v2(40.5,116.3) 40.049,116.3
  BottomLayer w1.6: v2@40.5,116.6 LCD.20
SEG16: LCD.21 U3.30 | length 24.4
  TopLayer w1.6: v2@42.5,116.6 LCD.21
  BottomLayer w0.178: U3.30 32.65,106.45 v2(42.5,116.3)
  BottomLayer w1.6: v2@42.5,116.6 LCD.21
SEG17: LCD.22 U3.31 | length 26.6
  TopLayer w1.6: v2@44.5,116.6 LCD.22
  BottomLayer w0.178: U3.31 33.941,105.95 44.291,116.3 v2(44.5,116.3)
  BottomLayer w1.6: v2@44.5,116.6 LCD.22
SEG18: LCD.23 U3.33 | length 29.6
  TopLayer w1.6: v2@46.5,116.6 LCD.23
  BottomLayer w0.178: U3.33 25.6,104.95 25.85,104.7 34.85,104.7 v2@46.5,116.35 ; v2(46.5,116.3) v2@46.5,116.35 ; v2@46.5,116.6 v2@46.5,116.35
  BottomLayer w1.6: v2@46.5,116.6 LCD.23
SWD_CLK: J1.4 U1.12 | length 14.4
  TopLayer w0.178: J1.4 10.637,78.023 v1(17.3,78.023)
  BottomLayer w0.178: U1.12 17.227,78.097 v1(17.3,78.023)
SWD_DATE: J1.5 U1.11 | length 15.1
  TopLayer w0.178: J1.5 8.82,77.3 17.595,77.3 v1(18.2,77.905)
  BottomLayer w0.178: U1.11 17.727,78.398 18.2,77.925 v1(18.2,77.905)
SWIM: J4.4 U3.1 | length 9.9
  BottomLayer w0.254: J4.4 8.64,101.7 13.3,101.7 15.05,103.45 U3.1
TXD: J2.1 U1.22 | length 11.8
  BottomLayer w0.254: J2.1 8,78.37 8,80.5 10.42,82.92 U1.22
VCC: BT1.1 C2.2 C3.2 C6.2 C7.2 C10.2 C13.2 C14.2 J1.1 J4.1 L1.1 pad.5@6.897,2.708 R1.2 R16.1 R22.2 U1.27 U2.2 U3.10 U3.11 U3.12 U3.39 U4.1 | length 222.5
  TopLayer w0.508: 11.45,87.621 11.5,87.571 ; v2(33,75.642) v2(33,77.8)
  TopLayer w1: J1.1 7.683,89.98 10.092,87.571 11.5,87.571 v2(15.2,87.571) 16.829,87.571 23.122,81.278 23.122,76.478 24.37,75.23 BT1.1 26.7,72.638 v2(32.1,67.238) ; pad.5@6.897,2.708 20.564,2.708 29.303,11.447 29.303,57.395 32.1,60.192 v2(32.1,64.005) ; J4.1 11.45,108.08 ; 11.45,87.621 v2(11.45,97.5) ; v2(13.25,109.65) 11.95,109.65 11.45,109.15 11.45,108.08 ; v2(26.2,100.1) 23.6,97.5 v2(23.1,97.5) v2(11.45,97.5) ; v2(11.45,97.5) v2(11.45,104.55) 11.45,108.08
  BottomLayer w0.254: U3.10 13.7,107.95 C14.2 C14.2@13.3,108.45 ; U3.11 C14.2@13.3,108.45 ; U3.12 13.8,108.95 C14.2@13.3,108.45 ; U1.27 16.227,86.327 ; U3.39 22.05,100.35 23.104,99.296 C13.2 ; v2(23.1,97.5) v2@23.104,97.504
  BottomLayer w0.3: v2(33,77.8) U4.1
  BottomLayer w0.305: U4.1 U4.1
  BottomLayer w0.508: J1.1 7.531,89.98 11.1,86.411 R1.2 ; v2(11.45,104.55) R22.2 ; v2@11.5,97.5 R16.1 ; C14.2 v2(13.25,109.65) ; C3.2 v2(15.2,87.571) C2.2 16.227,87.551 16.227,86.327 ; v2@23.104,97.504 C13.2 ; BT1.1@27.2,75.23 27.37,75.4 C10.2 29.8,75.4 30.059,75.659 ; C10.2@29.559,75.659 30.059,75.659 ; C7.2@31.4,75.659 30.059,75.659 ; L1.1 32.1,74 31.4,74.7 C7.2 32.992,75.65 v2(33,75.642) ; U2.2 35.972,99.822 C6.2
  BottomLayer w1: v2(26.2,100.1) C6.2 ; v2(32.1,64.005) v2(32.1,67.238)
Vled: C8.2 C9.2 pad.26 R14.1 R17.2 U4.4 | length 22
  TopLayer w0.508: v1(37.3,81.906) 37.3,74.6 v2(38,73.9)
  BottomLayer w0.305: U4.4 35.162,75.138 35.3,75 36.211,75 36.701,75.49 C8.2 ; v2(38,73.9) 37.6,74.3 C8.2 ; C9.2 39.06,75.95 38.6,75.49 C8.2
  BottomLayer w0.508: R14.1 v1(37.3,81.906) ; R17.2 38.8,73.2 39.9,74.3 C9.2
唤醒: pad.6 R16.2 U1.3 U3.48 | length 34.1
  TopLayer w0.178: v1(12.624,94.945) 12.624,89.676 13.6,88.7 17.4,88.7 23.3,82.8 v1(24.1,82.8)
  BottomLayer w0.178: v1(12.624,94.945) 12.624,95.524 pad.6 14.35,97.25 R16.2 15.663,98.813 15.663,100.463 16,100.8 17.4,100.8 17.55,100.95 U3.48 ; U1.3 23.98,82.92 v1@24.083,82.817
触摸防水: pad.23 R21.2 | length 30.9
  BottomLayer w0.5: R21.2 17.808,74.208 v2(16.9,73.3) 15.5,73.3 14.1,71.9 14.1,61.036 15.735,59.401 15.735,56.197 20.193,51.74 v1(20.193,48.587)
  other v1: 33.122,4.521 23.241,9.398 18.487,9.703 26.518,11.216 31.623,12.781 44.704,12.954 21.768,12.984 4.42,13.237 19.66,13.437 25.324,14.859 27.257,15.24 22.606,15.367 19.939,16.002 17.678,20.168 4.42,23.19 45.872,24.384 32.69,25.452 31.699,30.459 16.942,30.788 45.872,32.182 3.937,33.884 27,35.9 17.653,36.425 3.57,39.192 16.993,40.716 45.187,41.224 33.021,41.838 4.699,42.799 25.2,46.7 33.325,49.708 5.69,51.333 45.288,52.654 33.096,58.191 6.02,61.9 35.535,62.255 10.617,62.84 14.326,63.678 1.651,68.961 31.598,80.647 6.528,94.437 38.354,104.8 2.083,111.658
  other v3: 19.304,23.459 25.791,26.67
pads on no net: ?.1 ASE.157 ASE.158 ASE.159 ASE.160 ASE.161 ASE.162 ASE.163 ASE.164 ASE.165 ASE.166 ASE.167 ASE.168 ASE.169 ASE.170 ASE.171 ASE.172 ASE.173 ASE.174 ASE.175 ASE.176 ASE.177 ASE.178 ASE.179 ASE.180 ASE.181 ASE.182 ASE.183 ASE.184 ASE.185 ASE.186 ASE.187 ASE.188 ASE.189 ASE.190 ASE.191 ASE.192 ASE.193 ASE.194 ASE.195 ASE.196 ASE.197 ASE.198 ASE.199 ASE.200 ASE.201 ASE.202 ASE.203 ASE.204 ASE.205 ASE.206 ASE.207 ASE.208 ASE.209 ASE.210 ASE.211 ASE.212 ASE.213 ASE.214 ASE.215 ASE.216 ASE.217 ASE.218 ASE.219 ASE.220 ASE.221 ASE.222 ASE.223 ASE.224 ASE.225 ASE.226 ASE.227 ASE.228 ASE.229 ASE.230 ASE.231 ASE.232 ASE.233 ASE.234 ASE.235 ASE.236 ASE.237 ASE.238 ASE.239 ASE.240 ASE.241 ASE.242 ASE.243 ASE.244 ASE.245 ASE.246 ASE.247 ASE.248 ASE.249 ASE.250 ASE.251 ASE.252 ASE.253 ASE.254 ASE.255 ASE.256 ASE.257 ASE.258 ASE.259 ASE.260 ASE.261 ASE.262 ASE.263 ASE.264 ASE.265 ASE.266 ASE.267 ASE.268 ASE.269 ASE.270 ASE.271 ASE.272 ASE.273 ASE.274 ASE.275 ASE.276 ASE.277 ASE.278 ASE.279 ASE.280 ASE.281 ASE.282 ASE.283 ASE.284 ASE.285 ASE.286 ASE.287 ASE.288 ASE.289 ASE.290 ASE.291 ASE.292 ASE.293 ASE.294 ASE.295 ASE.296 ASE.297 ASE.298 ASE.299 ASE.300 ASE.301 ASE.302 ASE.303 ASE.304 ASE.305 ASE.306 ASE.307 ASE.308 ASE.309 ASE.310 ASE.311 ASE.312 U1.23 U2.3 U2.4 U2.10 U3.3 U3.4 U3.34 U3.36 U3.41 U3.42 U3.43 U3.46 U3.47 Y1.2 Y1.3

## Polygon pours and split planes (outlines as drawn)
触摸防水 on TopLayer "Top Layer-No Net 1" (hatched 45Degree grid 1.143 track 0.178, remove dead copper, pour order 0): -0.064,118.702 -0.064,-0.064 49.064,-0.064 49.064,117.892 49.064,118.702
触摸防水 on BottomLayer "Top Layer-No Net 1" (hatched 45Degree grid 1.778 track 0.178, remove dead copper, pour order 2): -1.619,120.864 -1.619,-2.072 0.159,-3.85 54.82,-3.85 54.82,117.714 48.749,123.785

## Keep-outs
KeepOutLayer:
  circle w0.1: c32.2,19 r0.8
  circle w0.1: c29.5,6.5 r0.6
  circle w0.1: c19.5,6.5 r0.8
  circle w0.1: c18.5,56.5 r0.6
  circle w0.1: c16.5,50.5 r0.8
  pour cut-out: 34,7.8 ccw(c39.5,7.8) 39.5,2.3 ccw(c39.5,7.8) 45,7.8 ccw(c39.5,7.8) 39.5,13.3 ccw(c39.5,7.8)
  pour cut-out: 4,7.8 ccw(c9.5,7.8) 9.5,2.3 ccw(c9.5,7.8) 15,7.8 ccw(c9.5,7.8) 9.5,13.3 ccw(c9.5,7.8)
  pour cut-out: 34,17.4 ccw(c39.5,17.4) 39.5,11.9 ccw(c39.5,17.4) 45,17.4 ccw(c39.5,17.4) 39.5,22.9 ccw(c39.5,17.4)
  pour cut-out: 4,17.4 ccw(c9.5,17.4) 9.5,11.9 ccw(c9.5,17.4) 15,17.4 ccw(c9.5,17.4) 9.5,22.9 ccw(c9.5,17.4)
  pour cut-out: 34,27 ccw(c39.5,27) 39.5,21.5 ccw(c39.5,27) 45,27 ccw(c39.5,27) 39.5,32.5 ccw(c39.5,27)
  pour cut-out: 4,27 ccw(c9.5,27) 9.5,21.5 ccw(c9.5,27) 15,27 ccw(c9.5,27) 9.5,32.5 ccw(c9.5,27)
  pour cut-out: 34,36.6 ccw(c39.5,36.6) 39.5,31.1 ccw(c39.5,36.6) 45,36.6 ccw(c39.5,36.6) 39.5,42.1 ccw(c39.5,36.6)
  pour cut-out: 4,36.6 ccw(c9.5,36.6) 9.5,31.1 ccw(c9.5,36.6) 15,36.6 ccw(c9.5,36.6) 9.5,42.1 ccw(c9.5,36.6)
  pour cut-out: 34,46.2 ccw(c39.5,46.2) 39.5,40.7 ccw(c39.5,46.2) 45,46.2 ccw(c39.5,46.2) 39.5,51.7 ccw(c39.5,46.2)
  pour cut-out: 4,46.2 ccw(c9.5,46.2) 9.5,40.7 ccw(c9.5,46.2) 15,46.2 ccw(c9.5,46.2) 9.5,51.7 ccw(c9.5,46.2)
  pour cut-out: 4,55.8 ccw(c9.5,55.8) 9.5,50.3 ccw(c9.5,55.8) 15,55.8 ccw(c9.5,55.8) 9.5,61.3 ccw(c9.5,55.8)
  pour cut-out: 34,55.8 ccw(c39.5,55.8) 39.5,50.3 ccw(c39.5,55.8) 45,55.8 ccw(c39.5,55.8) 39.5,61.3 ccw(c39.5,55.8)
  lines w0.127: 41.58,83.7 48,83.7 48,72.9 46,70.9 46,69.9 49,66.9 49,18.7 48,17.7 48,6.7 49,5.7 49,0 0,0 0,5.7 1,6.7 1,17.7 0,18.7 0,70.7 1,71.7 1,82.7 3,84.7 3,86.2 0,89.2 0,116.5 cw(c2,116.5) 2,118.5 47,118.5 cw(c47,116.5) 49,116.5 ; 41.58,83.718 41.58,83.903 41.58,96.901 48.997,96.901 48.997,116.497

## Other copper
TopLayer:
  region net GND: 40.792,65.625 39.387,67.031 39.345,67.031 37.897,65.583
  region net VCC: 12.751,97.5 11.45,98.801 11.45,96.114 12.776,97.44 12.776,97.5
  region net GND: 14.775,65.595 13.67,66.7 12.6,65.63 12.6,65.595
  region net VCC: 12.8,87.571 12.8,87.65 11.45,89 10.021,87.571
  region net GND: 16.9,101.3 17.7,100.5 16.9,100.5
  pour cut-out: 41.58,96.901 48.971,96.901 48.997,96.926 48.997,118.948 41.783,118.948 41.58,119.151
  pour cut-out: 41.58,83.718 41.58,66.98 42.062,66.497 49.784,66.497 49.784,83.414 50.038,83.668
BottomLayer:
  region net GND: 41.021,77.241 40.335,76.556 26.314,76.556 25.781,77.089 25.781,78.943 26.391,79.553 27.047,79.553 27.86,78.74 31.445,78.74 32.258,77.927 32.258,77.368 32.602,77.024 35.698,77.024 35.839,77.165 35.839,79.096 35.611,79.324 35.611,80.239 35.738,80.366 40.361,80.366 41.021,79.705
  region net GND: 35.509,76.886 35.24,77.155 ccw(c35.154,77.068) 35.154,77.191 ccw(c35.154,77.007) 35.024,77.137 34.798,76.911
  pour cut-out: 24.282,95.885 24.282,93.98 23.724,93.421 15.545,93.421 14.961,94.005 14.961,95.148 16.104,96.291 23.851,96.291 24.257,95.885
  region net VCC: 15.049,108.95 15.049,108.823 14.97,108.823 14.884,108.737 14.884,108.615 15.049,108.45 14.859,108.26 14.859,108.179 15.049,107.989 15.049,107.95 13.7,107.95 13.367,108.283 13.367,108.517 13.8,108.95
  region net VCC: 33.9,78.1 32.9,78.1 32.7,77.9 32.7,77.6 32.8,77.5 33.9,77.5
  region net Vled: 35,76.2 35,74.9 35.2,74.7 36.1,74.7 38.6,72.2 39,72.2 41,74.2 41,76.1 40.8,76.3 35.1,76.3
  region net NetL1_2: 34.1,74.1 34.4,74.4 34.4,76 34.5,76.1 34.7,75.9 34.7,74.8 35.1,74.4 35.7,74.4 36.7,73.4 36.7,69.7 36.1,69.1 34.4,69.1 34.1,69.4 34.1,74.1 34.4,74.4 34.4,75.739 34.4,74.4
  region net GND: 26.7,79.9 27.8,78.8 26.5,78.8 26.3,79
  region net VCC: 33.2,76.1 33.4,75.9 33.4,69.6 32.85,69.05 30.55,69.05 29.9,69.7 29.9,72.8 28.7,74 26.4,74 25.8,74.6 25.8,75.8 26.1,76.1
  region net NetL1_2: 35.585,69.164 35.204,68.783 35.027,68.783 34.646,69.164
  pour cut-out: 41.58,83.718 41.58,66.98 42.062,66.497 49.784,66.497 49.784,83.414 50.038,83.668
  pour cut-out: 41.58,96.901 48.971,96.901 48.997,96.926 48.997,118.948 41.783,118.948 41.58,119.151
  pour cut-out: 40,108 ccw(c42,108) 42,106 ccw(c42,108) 44,108 ccw(c42,108) 42,110 ccw(c42,108)
  pour cut-out: 24.4,111.6 ccw(c26.4,111.6) 26.4,109.6 ccw(c26.4,111.6) 28.4,111.6 ccw(c26.4,111.6) 26.4,113.6 ccw(c26.4,111.6)
  pour cut-out: 5,111 ccw(c7,111) 7,109 ccw(c7,111) 9,111 ccw(c7,111) 7,113 ccw(c7,111)
  pour cut-out: 12,100.2 ccw(c14,100.2) 14,98.2 ccw(c14,100.2) 16,100.2 ccw(c14,100.2) 14,102.2 ccw(c14,100.2)
  pour cut-out: 5.988,63.05 ccw(c7.988,63.05) 7.988,61.05 ccw(c7.988,63.05) 9.988,63.05 ccw(c7.988,63.05) 7.988,65.05 ccw(c7.988,63.05)

## Silkscreen, mask and mechanical layers (free items; w line width, h text height)
TopOverlay:
  lines w0.127: 0,2.6 0.7,2.6 ccw(c0.7,3) 0.7,3.4 0,3.4 ; 0,34.6 0.7,34.6 ccw(c0.7,35) 0.7,35.4 0,35.4 ; 1,115 48,115 ; 1,117.5 48,117.5 ; 4,4.9 4,5.3 ; 6.897,2.708 6.897,3.108 ; 49,2.6 48.3,2.6 cw(c48.3,3) 48.3,3.4 49,3.4 ; 3.4,4.5 cw(c3.4,4.9) 3.4,5.3 4.6,5.3 cw(c4.6,4.9) 4.6,4.5 3.4,4.5 ; 6.297,2.308 cw(c6.297,2.708) 6.297,3.108 7.497,3.108 cw(c7.497,2.708) 7.497,2.308 6.297,2.308 ; 17,21.5 32,21.5 32,22.5 17,22.5 17,21.5 ; 17,41.5 32,41.5 32,42.5 17,42.5 17,41.5 ; 17.25,56.1 18.1,56.1 18.1,55.25 18.9,55.25 18.9,56.1 19.75,56.1 19.75,56.9 18.9,56.9 18.9,57.75 18.1,57.75 18.1,56.9 17.25,56.9 17.25,56.1 ; 28.25,6.1 29.1,6.1 29.1,5.25 29.9,5.25 29.9,6.1 30.75,6.1 30.75,6.9 29.9,6.9 29.9,7.75 29.1,7.75 29.1,6.9 28.25,6.9 28.25,6.1
  text "-" at 3.7,6 h1.52
  text "+" at 5.1,0.7 h1.52
BottomOverlay:
  circle w0.127: c19.5,6.5 r1.25
  circle w0.127: c32.2,19 r1.25
  circle w0.127: c16.5,50.5 r1.25
  rectangle: 12.649,59.614 32.649,65.114
  rectangle: 2.455,67.271 5.056,68.486
  rectangle: 16.281,31.21 23.52,32.759
  rectangle: 16.281,33.71 23.52,35.259
  rectangle: 16.281,36.21 23.52,37.759
  rectangle: 16.281,38.71 23.52,40.259
  lines w0.127: 5,60.833 5,66.624 ; 24.427,30.767 24.427,33.267 24.427,35.767 24.427,38.267 24.427,40.767 ; 14.427,33.267 34.427,33.267 ; 14.427,33.267 14.427,30.767 34.427,30.767 34.427,33.267 ; 14.427,33.267 14.427,35.767 ; 14.427,35.767 34.427,35.767 ; 14.427,35.767 14.427,38.267 ; 14.427,38.267 34.427,38.267 ; 14.427,38.267 14.427,40.767 34.427,40.767 34.427,38.267 ; 34.427,33.267 34.427,35.767 ; 34.427,35.767 34.427,38.267 ; 6.3,95.8 6.3,98.5 15.6,98.5 15.6,100.5 19.9,100.5 19.9,96.5 11.5,96.5 10.8,95.8 6.3,95.8
  text "VCC" at 5.7,107.5 h1
  text "GND" at 5.7,104.967 h1
  text "NRST" at 5.7,102.433 h1
  text "SWIM" at 5.7,99.9 h1
  text "VCC" at 4.496,89.433 h1
  text "GND" at 4.5,87.5 h1
  text "RST" at 4.5,82.5 h1
  text "CLK" at 4.5,80.7 h1
  text "DATE" at 4.674,79.197 h1
  text "GND" at 24.9,77.2 h1
  text "TXD" at 4.498,76.292 h1
  text "VCC" at 24.9,74.6 h1
  text "RXD" at 4.498,73.692 h1
  text "AYBR3000-V1.1" at 32.1,50.5 h2
  text "XXJ170825" at 32,48.4 h2
  text "QDPX3528A" at 33.757,39.065 h1.5
  text "QDPX3325A/B" at 33.757,36.601 h1.5
  text "QTPX3630A" at 33.757,34.138 h1.5
  text "QDP2726ABC" at 33.757,31.674 h1.5

## Text inside footprints (layer, text, board x,y; h text height)
BT1: BottomOverlay "+" at 26.123,72.83 h1.15 r270
LEED-FREE: BottomOverlay "Pb" at 45.34,101.276 h3.2